# Altium PCB ip_phone_pcb.PcbDoc (part 2 of 4)
Units mil, origin at the board's own origin, x right, y up, seen from the top; angles counter-clockwise.
Board outline 2401.57 x 6885.83 mil, 6 copper layers (Component Side, Ground Plane, Inner Layer 1, Inner Layer 2, Power Plane, Solder Side), stack 60.4 mil thick; 371 components, 298 nets, 1249 pads, 735 vias.
Unrouted connection lines stored in the file: 81.
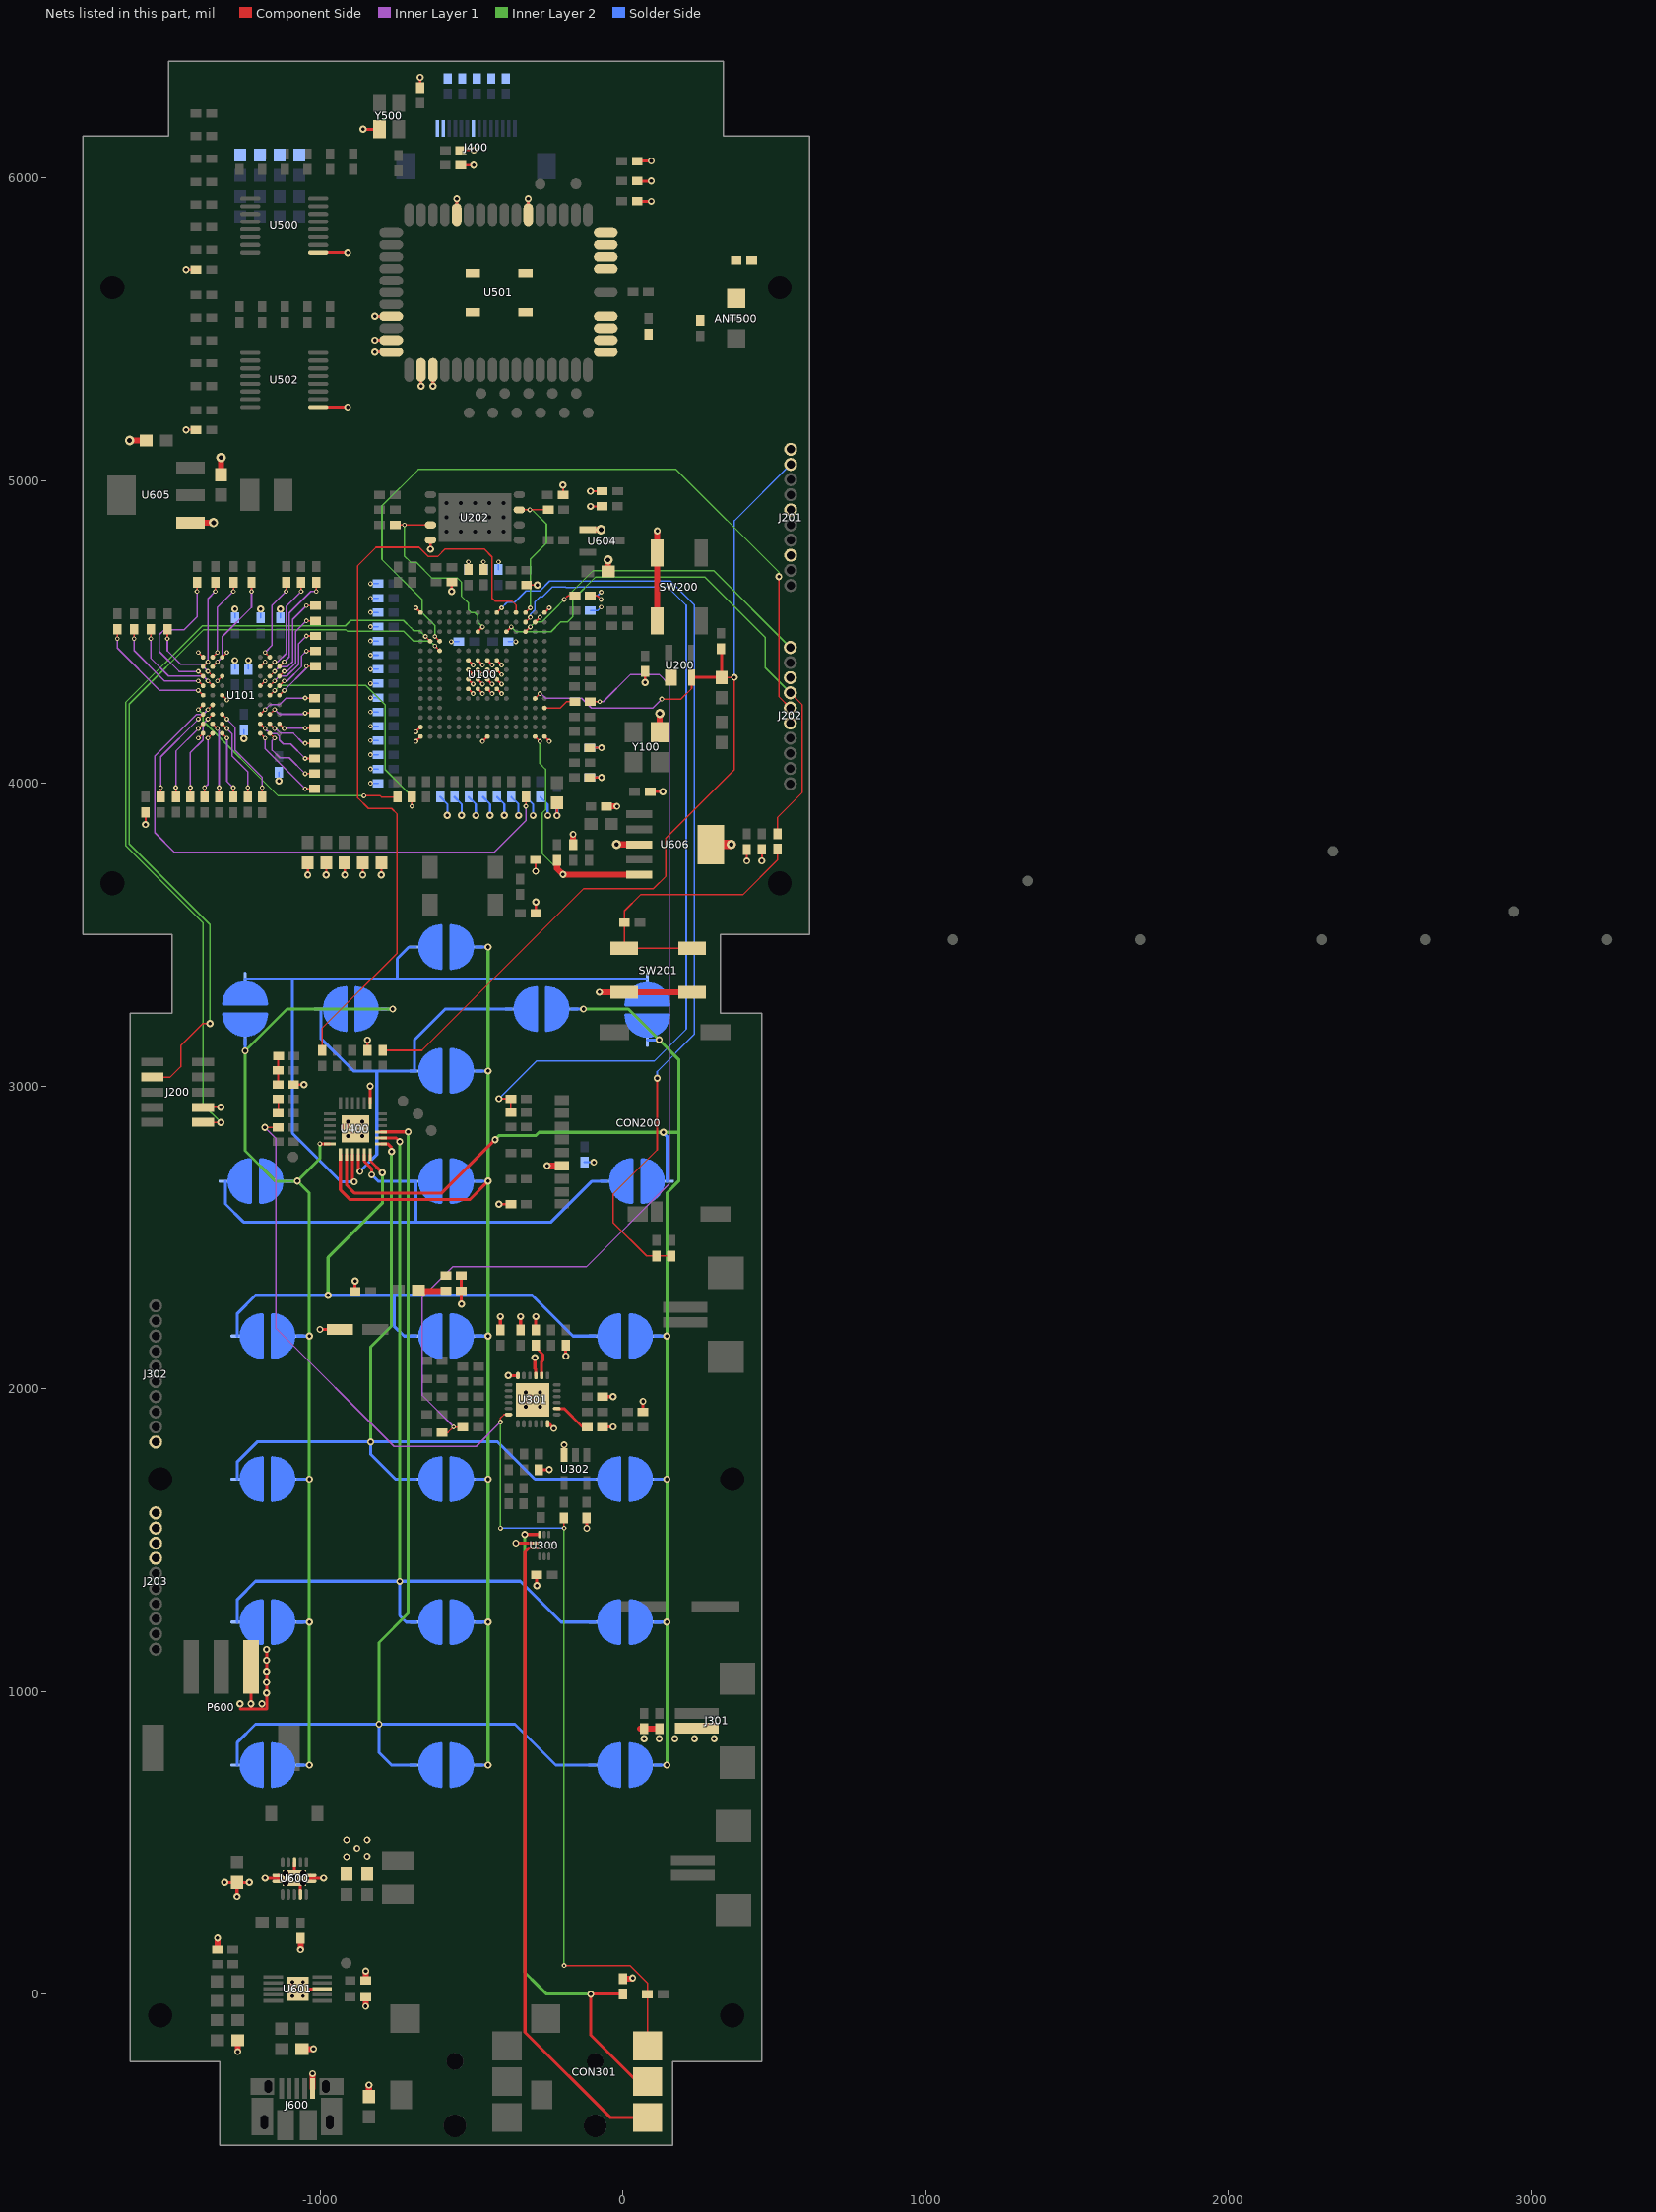
[diagram p6: the nets of this part, all layers, seen from the top]

## Part data
ANT500: library part Antenna2_4GHzChip, "Antenna 2.4GHz Ceramic Chip SMD"
C100 C509: library part Capacitor, "Ceramic Capacitor 10nF 50V X7R 0402"
C101: library part Capacitor, "Capacitor"
C102 C103 C104 C105 C106 C107 C108: library part Capacitor, "Ceramic Capacitor 0.01uF 50V X7R 0402"
C109 C110: library part Capacitor, "Ceramic Capacitor 22pF 50V 5% C0G 0402"
C200 C201 C202 C314 C315 C405 C501 C503 C504 C507 C508 C603 C611 C615 C616 C617 C618 C627 C628 C638 C639 C640 C641 C650 C653 C654 C655 C656: library part Capacitor, "MLCC - SMD/SMT 0.1UF 16V 10% 0402"
C300: library part Capacitor, "MLCC - SMD/SMT 100nF 16V 10% 0402"
C301: library part Capacitor, "MLCC - SMD/SMT 47nF 16V 10% 0402"
C302: library part Capacitor, "MLCC - SMD/SMT 1nF 16V 10% 0402"
C303: library part Capacitor_Electrolytic, "Aluminum Electrolytic Capacitors - SMD 6.3 Volts 10uF 20%"
C304 C307 C310 C311 C312 C313 C500 C502: library part Capacitor, "MLCC - SMD/SMT 4.7uF 20% 6.3Volts 0402"
C305 C306 C400 C401 C402 C403 C404 C610 C649 C651: library part Capacitor, "CAP CER 1.0UF 6.3V 20% X5R 0402"
C308: library part Capacitor_Electrolytic, "Aluminum Electrolytic Capacitors - SMD 6.3 Volts 220uF 20%"
C309: library part Capacitor, "Capacitor 220pF 0402"
C505: library part Capacitor, "MLCC - SMD/SMT 0402 120pF 50volts C0G 5%"
C506: library part Capacitor, "MLCC - SMD/SMT 0.3pF 50Volts C0G 0.1pF"
C600 C601 C602 C604 C605 C613 C614 C625 C626 C635 C636 C637 C652: library part Capacitor, "Capacitor SMD/SMT 0603 10uF 6.3volts X5R 20%"
C612: library part Capacitor, "Capacitor SMD/SMT 0603 2.2uF 10volts Y5V +80-20%"
C619 C620 C621 C622 C623 C624 C629 C630 C631 C632 C633 C634 C642 C643 C644 C645 C646 C647 C648: library part Capacitor, "Capacitor SMD/SMT 0402 0.01uF 16volts X7R 10%"
CON200: "CONN MEMORY CARD SD SMD"
CON300 CON301: library part Phone_Jack_1
D200 D201 D202 D203 D204 D600: library part LED, "LED"
J200: library part "Conector JTAG", "CONN HEADER .050\" 5x2"
J201 J202 J203 J302: library part "Conector 10pin", "CONN HEADER .050\" 10POS PCB GOLD"
J300 J301: library part Speaker_con, "Connector 2 Pin 1.25mm Male"
J600: library part CON_Micro_USB, "USB Connectors 5P Quick Connect Micro USB TypeB Rcpt"
L300: library part Inductor, "Ferrite Bead 60 Ohm @100MHz"
L500: library part Inductor, "Inductor"
L600: library part Inductor, "IND POWER 2.2UH 1.5A SMD"
L602: library part Inductor, "EMI/RFI Suppressors & Ferrites 0603 30 OHM"
M300: "Microphones -38DB 2VDC .5MA 2.2KOHM"
P600: library part CON_HEADER_3x1, "CONN HEADER 3POS 2.5MM R/A SMD"
R100 R101 R102 R103 R104 R105 R106 R107 R108 R109 R110 R111 R112 R113 R114 R115 R116 R117 R118 R119 R120 R121 R122 R123 R124 R125 R126 R127 R128 R129 R130 R131 R132 R134 R136 R138 R140 R141 R142 R308 R309 R311 R312 R326: library part Resistor, "Thick Film Resistors SMD 0402 22R 5%  1/16 W"
R133 R135 R607 R608 R614: library part Resistor, "Thick Film Resistors SMD 0402 10k 5%  1/16 W"
R137 R310 R316: library part Resistor, "Thick Film Resistors SMD 0402 100K 5%  1/16 W"
R139 R237 R238: library part Resistor, "Thick Film Resistors SMD 0402 33R 5%  1/16 W"
R143: library part Resistor, "Thick Film Resistors SMD 0402 33K 5%  1/16 W"
R144 R146 R201 R219 R220 R221 R222 R223 R224 R225 R226 R227 R228 R229 R230 R303 R306 R400 R402 R412 R502 R503 R504 R505 R506 R507 R508 R509 R510 R511 R512 R513 R515 R516 R517 R518 R519 R520 R521 R522 R523 R524: library part Resistor, "Thick Film Resistors SMD 0402 10K 5%  1/16 W"
R145: library part Resistor, "Thick Film Resistors SMD 0402 10M 5%  1/16 W"
R200 R210 R211 R212 R213 R602: library part Resistor, "Thick Film Resistors 1/16WATT 100R 0402"
R202 R203 R204 R205 R208 R209 R215 R218 R231 R232 R233 R234 R235 R236 R313 R317 R319 R320 R321 R322 R323 R324 R325 R327 R328 R329 R330 R331 R332 R333 R401 R403 R404 R405 R406 R407 R408 R409 R410 R411 R500 R525: library part Resistor, "Thick Film Resistors 0402 1/16W Jumper"
R206 R207 R314 R606: library part Resistor, "Thick Film Resistors SMD 0402 1K2 5%  1/16 W"
R214 R216 R217: library part Resistor, "Thick Film Resistors - SMD 1/16watt 49.9ohms 1% 0402"
R304: library part Resistor, "Thick Film Resistors SMD 0402 2K2 5%  1/16 W"
R315: library part Resistor, "Thick Film Resistor 330K 1% 1/16W"
R318: library part Resistor, "Thick Film Resistors SMD 0402 47K 5%  1/16 W"
R501 R514: library part Resistor, "Thick Film Resistors 1/16WATT 200K 0402"
R600: library part Resistor, "Thick Film Resistors 1.5KOHM 5% 1/10W"
R601 R611: library part Resistor, "Thick Film Resistors ZERO OHM JUMPER 1210"
R603 R604 R612: library part Resistor, "Thick Film Resistors ZERO OHM"
R605: library part Resistor, "Thick Film Resistors SMD 0402 680 5%  1/16 W"
R613: library part Resistor, "RES 20.5K OHM 1/10W 1% 0402 SMD"
R615: library part Resistor, "RES 255K OHM 1/10W 1% 0402 SMD"
SW200 SW201: library part SWITCH_PUSH_NA_SMD, "Switch tact, SMT, SPST, 160gf, 5.25 mm L x 5.25 mm W x 1.5 mm H"
U100: "Low Power Blackfin with Advanced Embedded Connectivity"
U101: "SDRAM 256M-Bit 16Mx16 3.3V 54-Pin VFBGA Tray"
U200: "IC Supervisor MPU 2.93V  SOT-143"
U202: "Flash Mem Serial-SPI 3V/3.3V 64M-Bit 64M x 1 8ns 8-Pin WSON Tray"
U300: "Analog Switch, Dual SPDT"
U301: "Mono Audio CODEC"
U302: "Low Voltage SPST Analog Switch"
U400: "IC Expander/Keyboard Controller"
U500 U502: "Translation - Voltage Levels +/-50mA 1.5ns 2.1-5V"
U501: "WiFi / 802.11 TiWi01-R2 Module with U.FL Connector"
U600: "HIGH EFFICIENT SINGLE INDUCTOR BUCK-BOOST CONVERTER WITH 1.8-A SWITCHES"
U601: "1A,Sgl Inp,Sgl Cell Li-Ion Batt Charger"
U604: "Low Dropout (LDO) Regulators 2.5V 300mA CMOS"
U605: "Low Dropout (LDO) Regulators 1.8V 1A Positive"
U606: "LDO Regulator"
X100: library part XTAL_32.768KHz, "Crystal 32.768KHz"
Y100: library part Oscillator_25MHz, "Crystal Clock Oscillator 25MHz  50ppm 3.3V"
Y500: library part Oscillator_32K, "Standard Clock Oscillators 32.768KHz 1.8V -40C +85C 25ppm"

## Free pads (board coordinates)
  rect 0x0 hole 78.74: ""(-1686.33,3670.18) ""(-1686.33,5638.69) ""(-1528.85,-69.98) ""(-1528.85,1701.68) ""(360.91,-69.98) ""(360.91,1701.68) ""(518.39,3670.18) ""(518.39,5638.69)

## Via types
v1: diameter 15.75, hole 7.87, Component Side to Solder Side, tented top, 367 vias
v2: diameter 23.62, hole 11.81, Component Side to Solder Side, 261 vias
v3: diameter 23.62, hole 11.81, Component Side to Solder Side, tented bottom, 44 vias
v4: diameter 31.5, hole 15.75, Component Side to Solder Side, 28 vias
v5: diameter 25.98, hole 12.99, Component Side to Solder Side, tented top, 8 vias
v6: diameter 15.75, hole 7.87, Component Side to Solder Side, 6 vias
v7: diameter 23.62, hole 11.81, Component Side to Solder Side, tented top, 6 vias
v8: diameter 17.72, hole 11.81, Component Side to Solder Side, 5 vias
v9: diameter 19.68, hole 19.68, Component Side to Solder Side, 5 vias
v10: diameter 23.62, hole 11.81, Component Side to Solder Side, tented both sides, 4 vias
v11: diameter 31.5, hole 15.75, Component Side to Solder Side, tented bottom, 1 vias

## Nets (pads, with @x,y where several pads share a name; then routed paths per layer and width w, separated by ;. In a path a pad name is that pad's centre, name@x,y a point inside that pad or via, vN(x,y) a via of type N, cw(c..) or ccw(c..) an arc to the next point about the centre after c; other vN are vias at no path point)
\E\M\U\: J200.4 U100.M5 | length 2626.9
  Component Side w5: J200.4@-1554.32,3029.89 -1495.54,3029.89 -1461.03,3064.39 -1461.03,3133.39 -1388.03,3206.39 v2(-1364.03,3206.39) ; v1(-621.24,4454.12) U100.M5@-605.49,4438.37
  Inner Layer 2 w5: v2(-1364.03,3206.39) -1364.03,3533.39 -1631.03,3800.39 -1631.03,4262.39 -1385.03,4508.39 -916.03,4508.39 -910.03,4502.39 -724.03,4502.39 -691.5,4469.87 -636.98,4469.87 v1(-621.24,4454.12)
\H\O\L\D\_FLASH: R228.1 U100.C1 U202.7 | length 491.5
  Component Side w5: U202.7@-342.43,4903.99 R228.1@-246.74,4903.99 ; U100.C1@-322.02,4564.35 v1(-306.28,4580.1)
  Inner Layer 2 w5: v1(-307.83,4904) -299.83,4904 -252.83,4857 -252.83,4793.59 -306.28,4740.15 v1(-306.28,4580.1)
\K\E\Y\P\A\D\_\I\N\T\: R406.1 U100.D1 | length 2555.1
  Component Side w5: R406.1@-994.12,3118.07 -994.12,3190.88 -746,3439 -746,3899 -764,3917 -841,3917 -876,3952 -876,4719.8 -815.8,4780 -673,4780 -642.56,4749.56 -612.44,4749.56 -588,4774 -458,4774 -432.26,4748.26 -432.26,4612 -422.76,4602.5 -366.39,4602.5 -353.52,4589.63 U100.D1@-353.52,4564.35
\R\E\S\E\T\: D200.2 J201.9 R201.1 R407.1 U100.B10 U200.2 | length 3549.1
  Component Side w5: R407.1@-794.12,3118.07 -663.93,3118.07 -129,3653 101,3653 142,3694 142,3820 367.99,4045.99 v2(367.99,4350.42) D200.2@326.32,4350.42 ; U100.B10@-290.53,4280.89 v1(-274.78,4296.64) ; v1(128.17,4279) 192.17,4279 226.87,4313.7 U200.2@226.87,4350.39 ; R201.1@324.32,4445.24 R201.1@326.32,4443.24
  Component Side w10: U200.2@226.87,4350.39 D200.2@326.3,4350.39 ; D200.2@326.32,4350.42 R201.1@326.32,4443.24
  Inner Layer 1 w5: v1(-274.78,4296.64) -270.39,4296.64 -255.02,4281.26 -136.44,4281.26 -104.17,4249 98.17,4249 v1(128.17,4279)
  Solder Side w5: v2(367.99,4350.42) 367.99,4867.88 J201.9@554,5053.89
\T\R\S\T\: J200.9 U100.N4 | length 2723.4
  Component Side w5: J200.9@-1387,2879.89 v2(-1328.21,2879.89) ; v1(-652.73,4485.61) U100.N4@-636.98,4469.87
  Inner Layer 2 w5: v2(-1328.21,2879.89) -1387.03,2938.71 -1387.03,3539.39 -1643.05,3795.41 -1643.05,4267.37 -1390.03,4520.39 -917.03,4520.39 -899.03,4538.39 -725.03,4538.39 -700.15,4513.52 -700.15,4513.45 -691.15,4504.44 -671.56,4504.44 v1(-652.73,4485.61)
\W\_FLASH: R226.1 U100.H3 U202.3 | length 650.4
  Component Side w5: R226.1@-752.74,4853.99 U202.3@-635.74,4853.99 ; U100.H3@-479.5,4501.36 v1(-463.76,4517.11)
  Inner Layer 2 w5: v1(-721.83,4854) -721.83,4751 -701.83,4731 -682.83,4731 -629.83,4678 -545.83,4678 -533.83,4666 -533.83,4619 -510.83,4596 -510.83,4573.94 -501.62,4564.73 -489.63,4564.73 -479.88,4554.97 -479.88,4533.23 v1(-463.76,4517.11)
A0: R100.1 U101.H7 | length 233.9
  Component Side w5: U101.H7@-1198.06,4196.88 v1(-1182.31,4181.13) ; v1(-1049.69,4082.35) R100.1@-1019.03,4082.35
  Inner Layer 1 w5: v1(-1182.31,4181.13) -1166.18,4165.01 -1144.44,4165.01 -1135.44,4156.01 -1135.44,4143.25 -1122.19,4130 -1097.34,4130 v1(-1049.69,4082.35)
A1: R102.1 U101.H8 | length 174.3
  Component Side w5: U101.H8@-1166.56,4196.88 v1(-1150.81,4181.13) ; v1(-1049.69,4132.35) R102.1@-1019.03,4132.35
  Inner Layer 1 w5: v1(-1150.81,4181.13) -1146.42,4181.13 -1131.05,4165.76 -1088.59,4165.76 -1055.19,4132.35 v1(-1049.69,4132.35)
A2: R104.1 U101.J8 | length 237.2
  Component Side w5: U101.J8@-1166.56,4165.39 v1(-1150.81,4149.64) ; v1(-1049.69,4032.35) R104.1@-1019.03,4032.35
  Inner Layer 1 w5: v1(-1150.81,4149.64) -1158.83,4141.61 -1158.83,4110 -1133.83,4085 -1102.34,4085 v1(-1049.69,4032.35)
A3: R106.1 U101.J7 | length 275.1
  Component Side w5: U101.J7@-1198.06,4165.39 v1(-1182.31,4149.64) ; v1(-1049.69,3982.35) R106.1@-1019.03,3982.35
  Inner Layer 1 w5: v1(-1182.31,4149.64) -1182.31,4114.97 v1(-1049.69,3982.35)
A4: R108.1 U101.J3 | length 225.4
  Component Side w5: U101.J3@-1324.04,4165.39 v1(-1308.29,4149.64) ; R108.1@-1287.15,3955.24 v1(-1287.15,3985.9)
  Inner Layer 1 w5: v1(-1308.29,4149.64) -1308.29,4007.04 v1(-1287.15,3985.9)
A5: R110.1 U101.J2 | length 221
  Component Side w5: R110.1@-1382.15,3955.42 v1(-1382.15,3986.08) ; v1(-1371.28,4149.64) U101.J2@-1355.54,4165.39
  Inner Layer 1 w5: v1(-1382.15,3986.08) -1371.28,3996.94 v1(-1371.28,4149.64)
A6: R112.1 U101.H3 | length 276.4
  Component Side w5: U101.H3@-1324.04,4196.88 v1(-1308.29,4181.13) ; R112.1@-1239.1,3955.7 v1(-1239.1,3986.36)
  Inner Layer 1 w5: v1(-1308.29,4181.13) -1291.83,4164.68 -1291.83,4091 -1239.1,4038.27 v1(-1239.1,3986.36)
A7: R114.1 U101.H2 | length 250.2
  Component Side w5: U101.H2@-1355.54,4196.88 v1(-1339.79,4181.13) ; R114.1@-1334.33,3955.51 v1(-1334.33,3986.17)
  Inner Layer 1 w5: v1(-1339.79,4181.13) -1334.33,4175.68 v1(-1334.33,3986.17)
A8: R116.1 U101.H1 | length 278.5
  Component Side w5: R116.1@-1477.33,3955.83 v1(-1477.33,3986.49) ; v1(-1402.78,4181.13) U101.H1@-1387.03,4196.88
  Inner Layer 1 w5: v1(-1477.33,3986.49) -1477.33,4106.58 v1(-1402.78,4181.13)
A9: R118.1 U101.G3 | length 327.8
  Component Side w5: U101.G3@-1324.04,4228.38 v1(-1308.29,4212.63) ; R118.1@-1192.15,3955.24 v1(-1192.15,3985.9)
  Inner Layer 1 w5: v1(-1308.29,4212.63) -1280.83,4185.17 -1280.83,4109 -1192.15,4020.31 v1(-1192.15,3985.9)
A10: R120.1 U101.H9 | length 123.1
  Component Side w5: U101.H9@-1135.06,4196.88 v1(-1119.32,4181.13) ; v1(-1049.69,4182.35) R120.1@-1019.03,4182.35
  Inner Layer 1 w5: v1(-1119.32,4181.13) -1118.09,4182.35 v1(-1049.69,4182.35)
A11: R122.1 U101.G2 | length 303.1
  Component Side w5: R122.1@-1429.1,3955.7 v1(-1429.1,3986.36) ; v1(-1371.28,4212.63) U101.G2@-1355.54,4228.38
  Inner Layer 1 w5: v1(-1429.1,3986.36) -1429.1,4101.57 -1387.41,4143.27 -1387.41,4196.51 v1(-1371.28,4212.63)
A12: R124.1 U101.G1 | length 331
  Component Side w5: R124.1@-1527.15,3955.42 v1(-1527.15,3986.08) ; v1(-1402.78,4212.63) U101.G1@-1387.03,4228.38
  Inner Layer 1 w5: v1(-1527.15,3986.08) -1527.15,4088.26 v1(-1402.78,4212.63)
ABE0: R132.2 U101.E8 | length 822.9
  Component Side w5: U101.E8@-1166.56,4291.37 v1(-1150.81,4307.12) ; v1(-697.85,3924.55) R132.2@-697.85,3955.21
  Inner Layer 2 w5: v1(-1150.81,4307.12) -1134.69,4323.24 -1112.95,4323.24 -1112.67,4323.52 -849.37,4323.52 -785.83,4259.98 -785.83,4045.57 -697.85,3957.59 v1(-697.85,3924.55)
ABE1: R131.2 U101.F1 | length 812.6
  Component Side w5: v1(-1402.78,4244.13) U101.F1@-1387.03,4259.87 ; v1(-855.83,3959) -801.83,3959 -798.05,3955.21 R131.2@-744.85,3955.21
  Inner Layer 2 w5: v1(-1402.78,4244.13) -1387.03,4228.38 -1387.03,4206.64 -1139.4,3959 v1(-855.83,3959)
AGND: ANT500.B C100.1 C101.1 C102.1 C103.1 C104.1 C105.1 C106.1 C107.1 C108.1 C109.1 C110.1 C200.1 C201.1 C202.1 C300.1 C301.1 C302.1 C303.2 C304.1 C307.1 C309.1 C310.2 C311.2 C312.2 C313.2 C314.1 C315.1 C400.2 C401.2 C402.2 C403.2 C404.2 C405.1 C500.2 C501.2 C502.2 C503.2 C504.2 C505.1 C506.1 C507.1 C508.1 C509.1 C600.1 C601.1 C602.1 C603.1 C604.1 C605.1 C610.2 C611.1 C612.1 C613.1 C614.1 C615.1 C616.1 C617.1 C618.1 C619.1 C620.1 C621.1 C622.1 C623.1 C624.1 C625.1 C626.1 C627.1 C628.1 C629.1 C630.1 C631.1 C632.1 C633.1 C634.1 C635.1 C636.1 C637.1 C638.1 C639.1 C640.1 C641.1 C642.1 C643.1 C644.1 C645.1 C646.1 C647.1 C648.1 C649.2 C650.1 C651.2 C652.1 C653.1 C654.1 C655.1 C656.1 CON200.6 J200.7 J201.3 J201.6 J201.10 J202.3 J202.6 J203.7 J203.8 J203.9 J203.10 J301.2 J302.10 J400.7 J600.5 L500.1 L500.2 L602.2 P600.1 R143.1 R144.1 R222.1 R235.1 R303.2 R314.2 R316.1 R318.2 R412.1 R605.1 R606.2 R608.2 R615.1 SW200.1 SW200.2 SW201.1 SW201.2 U100.A1 U100.A14 U100.B2 U100.F6 U100.F7 U100.F8 U100.F9 U100.G6 U100.G7 U100.G8 U100.G9 U100.G14 U100.H6 U100.H7 U100.H8 U100.H9 U100.J6 U100.J7 U100.J8 U100.J9 U100.P1 U100.P13 U100.P14 U101.A1 U101.A3 U101.B7 U101.C3 U101.D7 U101.E3 U101.J1 U200.1 U202.4 U300.6 U301.3 U301.6 U301.18 U302.3 U400.0 U400.19 U500.1 U501.6 U501.12 U501.24 U501.26 U501.27 U501.29 U501.30 U501.44 U501.45 U501.46 U501.47 U501.49 U501.50 U501.51 U501.52 U501.53 U501.54 U501.55 U501.56 U502.1 U600.3 U600.9 U600.15 U601.3 U604.1 U605.1 U606.3 U606.6 Y100.2 Y500.2 | length 7512.4
  Component Side w5: v1(-1402.78,4149.64) U101.J1@-1387.03,4165.39 ; v1(-1402.78,4433.1) U101.A1@-1387.03,4417.35 ; J200.7@-1387,2929.89 v2(-1328.21,2929.89) ; v1(-1339.79,4338.61) U101.C3@-1324.04,4354.36 ; U101.E3@-1324.04,4291.37 v1(-1308.29,4275.62) ; U101.A3@-1324.04,4417.35 v1(-1308.29,4433.1) ; U101.D7@-1198.06,4322.87 v1(-1182.31,4338.61) ; U101.B7@-1198.06,4385.86 v1(-1182.31,4401.61) ; C623.1@-511,4706.89 v1(-511,4731.89) ; C624.1@-460.63,4707.17 v1(-460.63,4732.17)
  Component Side w7: v2@-1577.19,3864.26 R144.1@-1577.19,3904.24 ; v2(-1443.23,5168.23) C508.1@-1410.27,5168.23 ; v2(-1443.23,5698.23) C507.1@-1410.27,5698.23 ; R412.1@-1088,3004.89 v2(-1053.89,3004.89) ; v2@-1041,3697.91 C613.1@-1041,3737.89 ; v2@-980,3697.91 C614.1@-980,3737.89 ; v2@-919,3697.91 C626.1@-919,3737.89 ; v2@-859,3697.91 C625.1@-859,3737.89 ; C405.1@-844.12,3117.89 v2(-844.12,3152) ; v2@-798,3697.91 C652.1@-798,3737.89 ; v1(-684.23,4139.16) U100.P14@-668.48,4154.91 ; v1(-684.23,4170.65) U100.P13@-668.48,4186.4 ; v1(-684.23,4580.1) U100.P1@-668.48,4564.35 ; C509.1@-670,6299 v2(-670,6333.11) ; v2(-635.74,4773.91) U202.4@-635.74,4803.99 ; v2(-565.74,4634.09) R222.1@-565.74,4665.99 ; C501.2@-535.82,6043 v2(-493.25,6043) ; C500.2@-535.41,6092.16 v2(-492.84,6092.16) ; U100.J9@-511,4312.39 v1(-495.25,4296.64) ; U100.J8@-511,4343.88 v1(-495.25,4328.13) ; U100.J7@-511,4375.38 v1(-495.25,4359.63) ; U100.J6@-511,4406.87 v1(-495.25,4391.13) ; U100.H9@-479.5,4312.39 v1(-463.76,4296.64) ; U100.H8@-479.5,4343.88 v1(-463.76,4328.13) ; U100.H7@-479.5,4375.38 v1(-463.76,4359.63) ; U100.H6@-479.5,4406.87 v1(-463.76,4391.13) ; v1(-463.76,4139.16) U100.G14@-448.01,4154.91 ; U100.G9@-448.01,4312.39 v1(-432.26,4296.64) ; U100.G8@-448.01,4343.88 v1(-432.26,4328.13) ; U100.G7@-448.01,4375.38 v1(-432.26,4359.63) ; U100.G6@-448.01,4406.87 v1(-432.26,4391.13) ; U100.F9@-416.51,4312.39 v1(-400.76,4296.64) ; U100.F8@-416.51,4343.88 v1(-400.76,4328.13) ; U100.F7@-416.51,4375.38 v1(-400.76,4359.63) ; U100.F6@-416.51,4406.87 v1(-400.76,4391.13) ; v2(-409.76,2609.62) R235.1@-370.34,2609.62 ; U100.B2@-290.53,4532.86 v1(-274.78,4548.61) ; v2(-288.85,3710.02) C109.1@-288.85,3747.39 ; C110.1@-287.85,3571.39 v2(-287.85,3608.77) ; U100.A14@-259.03,4154.91 v1(-243.28,4139.16) ; U100.A1@-259.03,4564.35 v1(-243.28,4580.1) ; v2@-218,3893.94 C637.1@-218,3933.92 ; C201.1@-198,4953.89 v2(-198,4985.65) ; C101.1@-109.18,4019.85 v2(-70.98,4019.85) ; R143.1@-109.18,4117.85 v2(-70.98,4117.85) ; v2(-107.76,4915.39) C610.2@-69.03,4915.39 ; v2(-107.58,4965.39) C611.1@-68.85,4965.39 ; v2(73.15,4334.02) C200.1@73.15,4370.39 ; C100.1@91.61,3972.85 v2(131.58,3972.85) ; v2(408.97,3743.83) C649.2@408.97,3782.03 ; v2(458.97,3744.02) C650.1@458.97,3782.21
  Component Side w10: v2(-1315.67,368.52) C600.1@-1274.91,368.52 ; v2(-1274.91,322.22) C600.1@-1274.91,368.52 ; -1265,942.43 -1229,942.43 ; v2(-1234.26,368.52) C600.1@-1274.91,368.52 ; P600.1@-1229,1064 -1229,942.43 ; -1193,942.43 -1229,942.43 ; v2(-1182,383) -1138.43,383 ; -1177.43,942.43 -1229,942.43 ; -1177,977 -1177,1013 ; -1177,978.43 -1177,942.43 v2@-1177,1144 ; -1177,1014 -1177,1050 -1177,1086 -1177,1122 ; U600.15@-1138.43,372.53 -1138.43,383 ; U600.15@-1138.43,392.21 -1138.43,383 ; U600.3@-1085.28,435.52 v9(-1085.28,382.37) -1065.59,362.69 U600.9@-1065.59,329.22 ; v8(-1074.34,17.35) U601.3@-993.63,17.35 ; U600.15@-1032.13,372.53 -1032.13,383 ; U600.15@-1032.13,392.21 -1032.13,383 ; U502.1@-1006.91,5243.52 v2(-909.52,5243.52) ; U500.1@-1006.91,5753.52 v2(-909.52,5753.52) ; v3(-1000.79,2195.79) C303.2@-935.63,2195.79 ; v2(-988.55,383) -1032.13,383 ; C300.1@-885.03,2322.1 v3(-885.03,2356.03) ; v2(-858.39,6161.39) Y500.2@-804,6161.39 ; U400.19@-835.06,2943.4 v2(-835.06,3000) ; v2(-819.54,5425.24) U501.27@-765.61,5425.24 ; v2(-819.54,5464.61) U501.26@-765.61,5464.61 ; v2(-819.54,5543.35) U501.24@-765.61,5543.35 ; v2(-667.18,5312.26) U501.29@-667.18,5366.19 ; v2(-627.81,5312.26) U501.30@-627.81,5366.19 ; U501.12@-549.07,5878 v2(-549.07,5931.93) ; v3(-533.67,2279.67) C301.1@-533.67,2323.39 C302.1@-533.67,2373.39 ; C312.2@-405,2194.96 v2(-405,2238.62) ; v7@-378.78,2043.78 U301.6@-347.26,2043.78 U301.6@-352.36,2043.78 ; v2(-353.92,1490.08) U300.6@-288.74,1490.08 ; C313.2@-338.2,2194.96 v2(-338.2,2238.62) ; U501.6@-312.85,5878 v2(-312.85,5931.93) ; v7(-291,2103) -291,2066.42 -288.2,2063.62 U301.3@-288.2,2043.78 ; C310.2@-288.2,2194.96 v2(-288.2,2238.62) ; v3(-285,1349.82) C314.1@-285,1386 ; R303.2@-277.57,1733.15 v2(-243.07,1733.15) ; U301.18@-248.83,1884.33 -244.07,1884.33 v7(-228.63,1868.9) ; U302.3@-194.44,1780.65 v2(-194.44,1815.16) ; v2(-188.93,2107.96) C304.1@-188.93,2143.71 ; v3(-119.64,1539.07) C315.1@-119.64,1573.72 ; C311.2@-67.14,1873.9 v2(-32.63,1873.9) ; C307.1@-67.14,1973.9 v2(-32.63,1973.9) ; C504.2@47.28,5923.52 v2(93.52,5923.52) ; C503.2@47.28,5990.52 v2(93.52,5990.52) ; C502.2@47.28,6056.52 v2(93.52,6056.52) ; R316.1@66.23,1923.9 v2(66.23,1958.4)
  Component Side w20: v4(-1629.89,5132.89) C635.1@-1575,5132.89 ; U605.1@-1427.96,4861.89 v4(-1352.58,4861.89) ; R608.2@-1339.5,146.98 v2(-1339.5,184.93) ; C636.1@-1328,5021.86 v4(-1328,5076.75) ; v2(-1272.63,-189.96) C605.1@-1272.63,-152.02 ; v2(-1064.91,146.57) C603.1@-1064.91,184.52 ; C604.1@-1060,-181.11 v2(-1022.06,-181.11) ; J600.5@-1025.64,-312.11 v2@-1025.64,-262.5 ; v2(-850,-39.97) R605.1@-850,-10.33 R605.1@-850,-10.11 ; R606.2@-849.82,46.89 v2(-849.82,76.6) ; L602.2@-839,-338.18 v2(-839,-300.24) ; v2(-250.28,2737.14) CON200.6@-201.83,2737.14 ; R615.1@-164.85,3797.39 v2(-164.85,3831.98) ; U604.1@-116.12,4838.48 v4(-72.73,4838.48) ; v2(-78.2,3310.22) SW201.2@4.59,3310.22 SW201.1@229,3310.22 ; C651.2@-54.67,3924.39 v2(-20.08,3924.39) ; C612.1@-49.12,4700.48 v4(-49.12,4738.39) ; v4(-21.23,3798.39) U606.3@54.15,3798.39 ; R314.2@0,51.18 29.75,51.18 v2(31.99,53.42) ; R318.2@56.96,876.67 R318.2@69.96,876.67 C309.1@106.96,876.67 ; SW200.1@113.26,4536.99 SW200.2@113.26,4761.4 v2(113.26,4834.78) ; Y100.2@121.64,4169.85 v4(121.64,4231.06)
  Component Side w30: U606.6@290.37,3798.39 v4(357.56,3798.39)
  Solder Side w5: C107.1@-1282.03,4377.35 v2(-1282.03,4406.35) ; C105.1@-1282.03,4547.35 v2(-1282.03,4576.35) ; v2(-1252.03,4148.35) C106.1@-1252.03,4177.35 ; C108.1@-1237.03,4377.35 v2(-1237.03,4406.35) ; C103.1@-1197.03,4547.35 v2(-1197.03,4576.35) ; v2(-1137.03,4008.35) C104.1@-1137.03,4037.35 ; C102.1@-1132.03,4547.35 v2(-1132.03,4576.35) ; v1(-834,4000.89) C631.1@-809,4000.89 ; v1(-834,4047.89) C654.1@-809,4047.89 ; v1(-834,4094.89) C655.1@-809,4094.89 ; v1(-834,4141.89) C632.1@-809,4141.89 ; v1(-834,4188.89) C618.1@-809,4188.89 ; v1(-834,4235.89) C656.1@-809,4235.89 ; v1(-834,4282.89) C634.1@-809,4282.89 ; v1(-834,4329.89) C633.1@-809,4329.89 ; v1(-834,4376.89) C627.1@-809,4376.89 ; v1(-834,4423.89) C628.1@-809,4423.89 ; v1(-834,4470.89) C617.1@-809,4470.89 ; v1(-834,4517.89) C620.1@-809,4517.89 ; v1(-834,4564.89) C619.1@-809,4564.89 ; v1(-834,4611.89) C621.1@-809,4611.89 ; v1(-834,4659.89) C622.1@-809,4659.89 ; v1(-567,4468) C616.1@-542,4468 ; C653.1@-511,4706.89 v1(-511,4731.89) ; C629.1@-460.63,4707.17 v1(-460.63,4732.17) ; C630.1@-411,4706.89 v1(-411,4731.89) ; C615.1@-379,4468 v1(-354,4468)
  Solder Side w7: C639.1@-603.85,3955.39 -580.15,3931.69 v2(-580.15,3894.24) ; C638.1@-556.85,3955.39 -533.15,3931.69 v2(-533.15,3894.24) ; C642.1@-509.85,3955.21 -486.15,3931.51 v2(-486.15,3894.06) ; C641.1@-462.85,3955.39 -439.15,3931.69 v2(-439.15,3894.24) ; C640.1@-415.85,3955.39 -392.15,3931.69 v2(-392.15,3894.24) ; C643.1@-368.85,3955.21 -345.15,3931.51 v2(-345.15,3894.06) ; C645.1@-320.85,3955.21 -297.15,3931.51 v2(-297.15,3894.06) ; C644.1@-272.74,3955.21 -249.04,3931.51 -249.04,3894.06 -248.98,3894 v2(-247.83,3894) ; v2(-218.3,3893.94) v2@-218,3894.24 ; C202.1@-127.34,2748.62 v2(-96.53,2748.62) ; C647.1@-109.18,4019.85 v2(-70.98,4019.85) ; C648.1@-109.18,4117.85 v2(-70.98,4117.85)
  Solder Side w10: v2@-218,3894.24 C646.1@-218,3937.86
  other v2: -1025.51,-262.5 -913.09,454.19 -845.09,455.77 -878.63,481.98 -913.09,509.77 -845.09,509.77 69.55,843.55 119.37,843.55 171.37,843.55 236.37,843.55 301.37,843.55 -1265,959.43 -1229,959.43 -1193,959.43 -1177,995.43 -1177,1030 -1177,1067 -1177,1103 -1177,1139 -1041.3,3697.91 -980.3,3697.91 -919.3,3697.91 -859.3,3697.91 -798.3,3697.91 -1577.48,3864.26
  other v5: -321.67,1940.43 -274.42,1940.43 -321.67,1987.68 -274.42,1987.68 -907.9,2835.05 -860.65,2835.05 -907.9,2882.3 -860.65,2882.3
  other v7: -379,2044
  other v8: -1092.06,-6.27 -1056.62,-6.27 -1092.06,40.98 -1056.62,40.98
  other v9: -1114.8,366.62 -1055.75,366.62 -1114.8,398.12 -1055.75,398.12
AVCC3V3: C301.2 C302.2 C310.1 C311.1 L300.2 U301.2 U301.20 | length 327.3
  Component Side w10: C310.1@-288.2,2143.78 -288.2,2137.2 -264,2113 -264,2094 ; U301.2@-268.52,2043.78 -268.52,2089.48 -264,2094 ; -267,2091 -264,2094 ; U301.20@-218.32,1934.53 -194.53,1934.53 -133.9,1873.9 C311.1@-118.32,1873.9
  Component Side w20: L300.2@-670.86,2323.39 C301.2@-584.85,2323.39
BA0: R126.1 U101.G7 | length 201.4
  Component Side w5: U101.G7@-1198.06,4228.38 v1(-1182.31,4244.13) ; v1(-1049.69,4282.35) R126.1@-1019.03,4282.35
  Inner Layer 1 w5: v1(-1182.31,4244.13) -1166.56,4259.87 -1135.06,4259.87 -1112.58,4282.35 v1(-1049.69,4282.35)
BA1: R128.1 U101.G8 | length 161.9
  Component Side w5: U101.G8@-1166.56,4228.38 v1(-1150.81,4244.13) ; v1(-1049.69,4232.35) R128.1@-1019.03,4232.35
  Inner Layer 1 w5: v1(-1150.81,4244.13) -1135.44,4228.75 -1053.3,4228.75 v1(-1049.69,4232.35)
BUTTON: R205.1 R223.1 SW201.3 SW201.4 | length 957.9
  Component Side w5: R223.1@4.59,3540.02 SW201.4@4.59,3455.89 SW201.3@229,3455.89 ; R223.1@4.97,3540.39 4.97,3578.97 58,3632 395.57,3632 509.97,3746.39 R205.1@509.97,3782.8
CLKOUT: R142.2 U101.F2 | length 1889.1
  Component Side w5: v1(-1371.28,4244.13) U101.F2@-1355.54,4259.87 ; v1(-320.85,3924.55) R142.2@-320.85,3955.21
  Inner Layer 1 w5: v1(-1371.28,4244.13) -1387.41,4228 -1409.15,4228 -1546.83,4090.32 -1546.83,3837.6 -1481.24,3772 -425.83,3772 -320.85,3876.98 v1(-320.85,3924.55)
COL: J202.4 R205.2 U100.E3 | length 1791.3
  Component Side w5: U100.E3@-385.02,4501.36 v1(-369.27,4517.11) ; R205.2@509.97,3833.98 509.97,3887.39 591.37,3968.79 591.37,4260.99 J202.4@552.97,4299.39
  Inner Layer 2 w5: v1(-369.27,4517.11) -353.52,4501.36 -237.82,4501.36 -205.41,4533.77 -182.66,4533.77 -166.03,4550.39 -166.03,4606.82 -90.46,4682.39 269.97,4682.39 469.97,4482.39 469.97,4382.39 J202.4@552.97,4299.39
COL1: KB400.2 KB403.2 KB406.2 KB409.2 KB412.2 KB415.2 KB418.2 U400.8 | length 4426.4
  Component Side w10: U400.8@-913.8,2773.95 -913.8,2673.8 -886,2646 -599.64,2646 v3(-422.34,2823.3)
  Inner Layer 2 w10: v3(-422.34,2823.3) -408.24,2837.39 -287.03,2837.39 -277.03,2847.39 184.27,2847.39 ; v3(-130.69,3254.83) 17.56,3254.83 v10(119.54,3152.85) 184.27,3088.12 184.27,2685.93 144.9,2646.56 v3(144.9,1229.24) v3(144.9,756.8)
  Solder Side w10: KB403.2@-169.83,3254.83 v3(-130.69,3254.83) ; KB400.2@80.4,3152.85 v10(119.54,3152.85) ; KB418.2@105.76,756.8 v3(144.9,756.8) ; KB415.2@105.76,1229.24 v3(144.9,1229.24) ; KB412.2@105.76,1701.68 v3(144.9,1701.68) ; KB409.2@105.76,2174.12 v3(144.9,2174.12) ; v10@132.37,2847.39 145.13,2834.63 KB406.2@145.13,2685.93
  other v10: 133.37,2847.39
COL2: KB401.2 KB404.2 KB407.2 KB410.2 KB413.2 KB416.2 KB419.2 U400.7 | length 3619.7
  Component Side w10: U400.7@-933.49,2773.95 -933.49,2657.49 -901,2625 -506.58,2625 v3(-445.65,2685.93)
  Inner Layer 2 w10: v3(-445.65,756.8) v3(-445.65,1229.24) v3(-445.65,2685.93) v3(-445.65,3459.55)
  Solder Side w10: KB419.2@-484.79,756.8 v3(-445.65,756.8) ; KB416.2@-484.79,1229.24 v3(-445.65,1229.24) ; KB413.2@-484.79,1701.68 v3(-445.65,1701.68) ; KB410.2@-484.79,2174.12 v3(-445.65,2174.12) ; KB407.2@-484.79,2685.93 v3(-445.65,2685.93) ; KB404.2@-484.79,3050.1 v3(-445.65,3050.1) ; KB401.2@-484.79,3459.55 v3(-445.65,3459.55)
COL3: KB402.2 KB405.2 KB408.2 KB411.2 KB414.2 KB417.2 KB420.2 U400.6 | length 3495.7
  Component Side w10: v6(-1001.49,2809.46) U400.6@-969,2809.46
  Inner Layer 2 w10: v3(-1036.2,756.8) v3(-1036.2,1229.24) v3(-1036.2,1701.68) v3(-1036.2,2174.12) -1036.2,2646.56 v3(-1075.57,2685.93) ; v6(-1001.49,2809.46) -1001.49,2760.01 v3(-1075.57,2685.93) ; v3(-760.61,3254.83) -1110.02,3254.83 v3(-1248.34,3116.51) -1248.34,2786.34 -1147.93,2685.93 v3(-1075.57,2685.93)
  Solder Side w10: v3(-1248.34,3116.51) KB402.2@-1248.34,3155.65 ; KB408.2@-1114.71,2685.93 v3(-1075.57,2685.93) ; KB420.2@-1075.34,756.8 v3(-1036.2,756.8) ; KB417.2@-1075.34,1229.24 v3(-1036.2,1229.24) ; KB414.2@-1075.34,1701.68 v3(-1036.2,1701.68) ; KB411.2@-1075.34,2174.12 v3(-1036.2,2174.12) ; KB405.2@-799.75,3254.83 v3(-760.61,3254.83)
CRS_DV: J202.5 U100.M4 | length 2492.3
  Component Side w5: v1(-621.24,4485.61) U100.M4@-605.49,4469.87 ; v2(514.97,4683.39) 514.97,4287.39 J202.5@552.97,4249.39
  Inner Layer 2 w5: v1(-621.24,4485.61) -621.24,4521.5 -663.03,4563.29 -663.03,4606.54 -796.03,4739.54 -796.03,4917.39 -676.01,5037.41 175.95,5037.41 514.97,4698.39 v2(514.97,4683.39)
CS_SDCARD: R229.1 R232.1 U100.C2 | length 2823.8
  Component Side w5: v2(-409.76,2958.62) R229.1@-370.34,2958.62 R232.1@-370.34,2912.62 ; U100.C2@-322.02,4532.86 v1(-306.28,4548.61)
  Solder Side w5: v2(-409.76,2958.62) -285.99,3082.39 102.97,3082.39 208.97,3188.39 208.97,4588.11 148.68,4648.39 -151.8,4648.39 -151.97,4648.22 -187.8,4648.22 -187.97,4648.39 -234.03,4648.39 -266.03,4616.39 -274.03,4616.39 -290.9,4599.52 -290.9,4573.73 -306.28,4558.36 v1(-306.28,4548.61)
D0: R101.2 U101.A8 | length 282.9
  Component Side w5: v1(-1182.31,4433.1) U101.A8@-1166.56,4417.35 ; v1(-1112.96,4634.3) R101.2@-1112.96,4664.96
  Inner Layer 1 w5: v1(-1182.31,4433.1) -1159.15,4456.26 -1159.15,4588.11 v1(-1112.96,4634.3)
D1: R103.2 U101.B9 | length 340.3
  Component Side w5: U101.B9@-1135.06,4385.86 v1(-1119.31,4401.61) ; v1(-1012.96,4634.3) R103.2@-1012.96,4664.96
  Inner Layer 1 w5: v1(-1119.31,4401.61) -1102.72,4418.2 -1102.72,4562.66 -1031.08,4634.3 v1(-1012.96,4634.3)
D2: R105.2 U101.B8 | length 327.8
  Component Side w5: U101.B8@-1166.56,4385.86 v1(-1150.81,4401.61) ; v1(-1062.96,4634.3) R105.2@-1062.96,4664.96
  Inner Layer 1 w5: v1(-1150.81,4401.61) -1141.06,4401.61 -1112.72,4429.94 -1112.72,4584.35 -1112.81,4584.44 v1(-1062.96,4634.3)
D3: R107.2 U101.C9 | length 256.6
  Component Side w5: U101.C9@-1135.06,4354.36 v1(-1119.31,4370.11) ; v1(-1045.87,4537.35) R107.2@-1015.21,4537.35
  Inner Layer 1 w5: v1(-1119.31,4370.11) -1109.13,4370.11 -1081.25,4397.99 -1081.25,4501.98 v1(-1045.87,4537.35)
D4: R109.2 U101.C8 | length 329.8
  Component Side w5: U101.C8@-1166.56,4354.36 v1(-1150.81,4370.11) ; v1(-1045.87,4587.35) R109.2@-1015.21,4587.35
  Inner Layer 1 w5: v1(-1150.81,4370.11) -1135.44,4385.48 -1107.9,4385.48 -1091.25,4402.13 -1091.25,4541.98 v1(-1045.87,4587.35)
D5: R111.2 U101.D9 | length 188.3
  Component Side w5: U101.D9@-1135.06,4322.87 v1(-1119.31,4338.61) ; v1(-1045.87,4437.35) R111.2@-1015.21,4437.35
  Inner Layer 1 w5: v1(-1119.31,4338.61) -1108.77,4338.61 -1061.25,4386.13 -1061.25,4421.98 v1(-1045.87,4437.35)
D6: R113.2 U101.D8 | length 259.4
  Component Side w5: U101.D8@-1166.56,4322.87 v1(-1150.81,4338.61) ; v1(-1045.87,4487.35) R113.2@-1015.21,4487.35
  Inner Layer 1 w5: v1(-1150.81,4338.61) -1134.69,4354.74 -1110.36,4354.74 -1071.25,4393.85 -1071.25,4461.98 v1(-1045.87,4487.35)
D7: R115.2 U101.E9 | length 163.6
  Component Side w5: U101.E9@-1135.06,4291.37 v1(-1119.31,4307.12) ; v1(-1045.87,4387.35) R115.2@-1015.21,4387.35
  Inner Layer 1 w5: v1(-1119.31,4307.12) -1045.87,4380.56 v1(-1045.87,4387.35)
D8: R117.2 U101.E1 | length 409.6
  Component Side w5: v1(-1670.03,4478.51) R117.2@-1670.03,4509.17 ; v1(-1402.78,4307.12) U101.E1@-1387.03,4291.37
  Inner Layer 1 w5: v1(-1670.03,4478.51) -1670.03,4447.12 -1530.03,4307.12 v1(-1402.78,4307.12)
D9: R119.2 U101.D2 | length 337.3
  Component Side w5: v1(-1560.03,4478.51) R119.2@-1560.03,4509.17 ; v1(-1371.28,4338.61) U101.D2@-1355.54,4322.87
  Inner Layer 1 w5: v1(-1560.03,4478.51) -1560.03,4414.12 -1500.65,4354.74 -1387.41,4354.74 v1(-1371.28,4338.61)
D10: R121.2 U101.D1 | length 346.2
  Component Side w5: v1(-1615.03,4478.51) R121.2@-1615.03,4509.17 ; v1(-1402.78,4338.61) U101.D1@-1387.03,4322.87
  Inner Layer 1 w5: v1(-1615.03,4478.51) -1615.03,4439.12 -1514.52,4338.61 v1(-1402.78,4338.61)
D11: R123.2 U101.C2 | length 255.2
  Component Side w5: v1(-1505.03,4478.51) R123.2@-1505.03,4509.17 ; v1(-1371.28,4370.11) U101.C2@-1355.54,4354.36
  Inner Layer 1 w5: v1(-1505.03,4478.51) -1505.03,4438.12 -1460.15,4393.24 -1394.41,4393.24 v1(-1371.28,4370.11)
D12: R125.2 U101.C1 | length 498.5
  Component Side w5: v1(-1407.03,4634.51) R125.2@-1407.03,4665.17 ; v1(-1402.78,4370.11) U101.C1@-1387.03,4354.36
  Inner Layer 1 w5: v1(-1407.03,4634.51) -1407.03,4550.35 -1449.15,4508.24 -1515.15,4508.24 -1532.15,4491.24 -1532.15,4436.24 -1466.02,4370.11 v1(-1402.78,4370.11)
D13: R127.2 U101.B2 | length 332.5
  Component Side w5: U101.B2@-1355.54,4385.86 v1(-1339.79,4401.61) ; v1(-1227.03,4634.51) R127.2@-1227.03,4665.17
  Inner Layer 1 w5: v1(-1339.79,4401.61) -1323.67,4417.73 -1323.67,4484.72 -1227.03,4581.35 v1(-1227.03,4634.51)
D14: R129.2 U101.B1 | length 295.9
  Component Side w5: U101.B1@-1387.03,4385.86 v1(-1371.28,4401.61) ; v1(-1347.03,4634.51) R129.2@-1347.03,4665.17
  Inner Layer 1 w5: v1(-1371.28,4401.61) -1371.28,4610.26 v1(-1347.03,4634.51)
D15: R130.2 U101.A2 | length 276.2
  Component Side w5: U101.A2@-1355.54,4417.35 v1(-1339.79,4433.1) ; v1(-1287.03,4634.51) R130.2@-1287.03,4665.17
  Inner Layer 1 w5: v1(-1339.79,4433.1) -1339.79,4581.76 v1(-1287.03,4634.51)
DET_SDCARD: R230.1 R236.1 U100.F1 | length 3117.8
  Component Side w5: U100.F1@-416.51,4564.35 v1(-400.76,4580.1) ; v2(113,3026.42) 113,2789.42 -33.03,2643.39 -33.03,2549.69 77.85,2438.8 R230.1@159.16,2438.8
  Solder Side w5: v1(-400.76,4580.1) -382.03,4598.83 -357.59,4598.83 -320.03,4636.39 -274.32,4636.39 -242.32,4668.39 -179.68,4668.39 -179.51,4668.22 -160.25,4668.22 -160.08,4668.39 156.97,4668.39 186.97,4638.39 187.11,4638.39 235.97,4589.54 235.97,3171.36 113,3048.39 v2(113,3026.42)
EXT_WAKE: R614.2 U100.B14 U606.5 | length 811.4
  Component Side w5: U100.B14@-290.53,4154.91 v1(-274.78,4139.16)
  Component Side w20: R614.2@-217.85,3746.21 -217.85,3719.02 -197.23,3698.39 U606.5@54.15,3698.39
  Inner Layer 2 w5: v1(-274.78,4139.16) -274.78,4065.94 -255.83,4047 -255.83,3913.31 -267.15,3902 -267.15,3768.31 v2(-197.83,3699)
HP_GND: CON301.1 U300.7 | length 2148.6
  Component Side w10: U300.7@-288.74,1474.33 -310.2,1474.33 -323.63,1460.9 -323.63,-126.26 -42.68,-407.22 CON301.1@81,-407.22
HP_OUT: CON301.3 R314.1 U300.5 | length 2235.6
  Component Side w10: v2(-324.38,1518.62) U300.5@-275.95,1518.62 ; R314.1@0,0 v2(-106.45,0) -106.45,-135.45 47.21,-289.11 CON301.3@81,-289.11
  Inner Layer 2 w10: v2(-324.38,1518.62) -324.38,72.32 -281.01,28.95 -252.06,0 v2(-106.45,0)
JACK_EN: CON301.5 R310.1 R317.2 R409.1 U301.12 | length 4253.3
  Component Side w5: v3(-1183,2863.89) R409.1@-1139,2863.89 ; v6(-404.63,1889.9) -404.63,1902.9 -392.69,1914.84 U301.12@-377.77,1914.84 ; v6(-194.44,94.55) 23.12,94.55 80.55,37.12 80.55,0.45 R310.1@81,0 ; v6(-194.44,1539.98) R317.2@-194.44,1573.72 ; R310.1@76.97,0 R310.1@81,0 ; CON301.5@81,-171 R310.1@81,0
  Inner Layer 1 w5: v3(-1183,2863.89) -1147,2827.89 -1147,2201 -756,1810 -484.53,1810 v6(-404.63,1889.9)
  Inner Layer 2 w5: v6@-404.63,1539.98 v6(-404.63,1889.9) ; v6(-194.44,94.55) v6(-194.44,1539.98)
  Solder Side w5: v6@-403.55,1539.98 v6(-194.44,1539.98)
  other v6: -404.63,1539.26
L\C\D\_\C\S\: J400.1 R402.1 R411.1 R412.2 | length 95.5
  Component Side w5: R412.2@-1139.18,3004.89 -1139.18,3098.71 R402.1@-1138,3099.89
L\C\D\_\R\E\S\E\T\: J400.2 R400.1 R410.1 | length 47
  Component Side w5: R400.1@-1139,2910.71 R410.1@-1139,2957.71
LED1: D204.2 R203.1 | length 40
  Solder Side w5: R203.1@-107.74,4619.99 -84.68,4619.99 v1@-72.68,4631.99
  other v1: -71.87,4631.99
LED2: D203.2 R208.1 | length 40
  Component Side w5: R208.1@-107.74,4619.99 -84.68,4619.99 v1(-72.68,4607.99)
LED3: D202.2 R209.1 | length 40
  Solder Side w5: R209.1@-107.85,4570.39 -84.79,4570.39 v1@-72.79,4582.39
  other v1: -71.98,4582.39
LED4: D201.2 R215.1 | length 36.1
  Component Side w5: R215.1@-318.74,4655.99 v2(-282.63,4655.99)
LIN1: KB400.1 KB401.1 KB402.1 U400.9 | length 2345.3
  Component Side w10: U400.9@-894.12,2773.95 -894.12,2690.12 v3(-888,2684)
  Solder Side w5: -707.28,3459.55 KB401.1@-683.15,3459.55
  Solder Side w10: KB402.1@-1248.34,3354 -1092,3354 -1092,2844.17 -931.83,2684 v3(-888,2684) ; -1093,3354 -745.83,3354 ; -707.28,3459.55 -745.83,3421 -745.83,3354 ; KB400.1@77.6,3354 -745.83,3354
LIN2: KB403.1 KB404.1 KB405.1 U400.10 | length 1377.6
  Component Side w10: U400.10@-874.43,2773.95 -874.43,2723.43 v3(-869,2718)
  Solder Side w5: -688.83,3055.79 KB404.1@-683.15,3050.1
  Solder Side w10: KB405.1@-998.11,3254.83 -998.11,3157.71 -890.5,3050.1 ; v3(-869,2718) -813,2774 -813,3050.1 ; -851.1,3050.1 -890.5,3050.1 ; -688.83,3055.79 -688.83,3153 -587.01,3254.83 KB403.1@-368.19,3254.83 ; KB404.1@-683.15,3050.1 -890.5,3050.1
LIN3: KB406.1 KB407.1 KB408.1 U400.11 | length 1782.6
  Component Side w10: U400.11@-854.75,2773.95 -854.75,2751.75 -830,2727 v3(-830,2707)
  Solder Side w10: KB408.1@-1313.06,2685.93 -1313.06,2610.74 -1253.37,2551.05 -236.95,2551.05 -102.07,2685.93 KB406.1@-53.22,2685.93 ; v3(-830,2707) -808.93,2685.93 KB407.1@-683.15,2685.93 -683.15,2551.74
LIN4: KB409.1 KB410.1 KB411.1 U400.12 | length 2081.1
  Component Side w10: U400.12@-835.06,2773.95 -835.06,2754.06 v3(-795,2714)
  Inner Layer 2 w10: v3(-974,2309) -974,2434 -795,2613 v3(-795,2714)
  Solder Side w10: KB411.1@-1273.7,2174.12 -1273.7,2249.3 -1214,2309 v3(-974,2309) -756,2309 ; KB410.1@-683.15,2174.12 -723.12,2174.12 -756,2207 -756,2309 ; KB409.1@-92.59,2174.12 -165.12,2174.12 -300,2309 -756,2309
LIN5: KB412.1 KB413.1 KB414.1 U400.13 | length 2582.9
  Component Side w10: U400.13@-799.55,2809.46 -777.46,2809.46 -764.55,2796.55 v3(-764.55,2784)
  Inner Layer 2 w10: v2(-833.26,1824.79) -833.26,2138.47 -764.55,2207.18 v3(-764.55,2784)
  Solder Side w10: KB414.1@-1273.7,1701.68 -1273.7,1759.79 -1208.7,1824.79 -414.01,1824.79 -290.9,1701.68 KB412.1@-92.59,1701.68 ; v2(-833.26,1824.79) -833.26,1783.65 -751.28,1701.68 KB413.1@-683.15,1701.68
LIN6: KB415.1 KB416.1 KB417.1 U400.14 | length 3033
  Component Side w10: U400.14@-799.55,2829.15 -750.7,2829.15 v3(-737.55,2816)
  Inner Layer 2 w10: v3@-737.55,1365.4 v3(-737.55,2816)
  Solder Side w5: v3(-737.67,1363.64) -737.64,1364.12 v3@-737.55,1365.4
  Solder Side w10: KB417.1@-1273.7,1229.24 -1273.7,1304.42 -1214,1364.12 v3@-737.67,1364.12 ; v3(-737.67,1363.64) -737.67,1250.67 -716.24,1229.24 KB416.1@-683.15,1229.24 ; v3@-737.64,1364.12 -339.12,1364.12 -204.24,1229.24 KB415.1@-92.59,1229.24
LIN7: KB418.1 KB419.1 KB420.1 U400.15 | length 3656.1
  Component Side w10: U400.15@-799.55,2848.83 v3(-710,2848.83)
  Inner Layer 2 w10: v3(-806,891.68) -806,1162 -710,1258 -710,2745 ; -710,2745.83 v3(-710,2848.83)
  Solder Side w10: KB420.1@-1273.7,756.8 -1273.7,831.98 -1214,891.68 v3(-806,891.68) ; KB419.1@-683.15,756.8 -764.8,756.8 -806,798 v3(-806,891.68) ; KB418.1@-92.59,756.8 -221.8,756.8 -356.68,891.68 v3(-806,891.68)
MCLK: R326.2 U100.A11 | length 108.7
  Component Side w5: U100.A11@-259.03,4249.39 -207.44,4249.39 -186.44,4270.39 R326.2@-159.03,4270.39
MCLK_CON: R325.1 R326.1 R333.2 | length 3480.4
  Component Side w5: R333.2@-597.45,1855.79 -577.72,1855.79 v1(-559.61,1873.9) R325.1@-528.95,1873.9 ; R326.1@-107.85,4270.39 v1(-77.19,4270.39)
  Inner Layer 1 w5: v1(-559.61,1873.9) -559.61,1874.62 -663.04,1978.06 -663.04,2302.19 -561.18,2404.06 -119.75,2404.06 153.15,2676.95 153.15,4326.39 119.15,4360.39 24.81,4360.39 -65.19,4270.39 v1(-77.19,4270.39)
MDC: J202.1 R208.2 U100.C3 | length 1104.4
  Component Side w5: U100.C3@-322.02,4501.36 v1(-306.28,4517.11) ; v1(-193.98,4607.99) -181.98,4619.99 R208.2@-158.92,4619.99
  Inner Layer 2 w5: v1(-306.28,4517.11) -290.15,4533.23 -268.41,4533.23 -227.91,4573.73 ; -227.91,4574.06 -227.91,4573.73 ; J202.1@552.97,4449.39 298.97,4703.39 -98.58,4703.39 v1(-193.98,4607.99) -193.98,4607.66 -227.91,4573.73